# Altium PCB MemoryBoard_AT25DFxxx.PcbDoc
Units mm, origin at the board's own origin, x right, y up, seen from the top; angles counter-clockwise.
Board outline 44 x 44 mm, 2 copper layers (Top Layer, Bottom Layer), stack 1.571 mm thick; 17 components, 12 nets, 103 pads, 14 vias.
Unrouted connection lines stored in the file: 12.
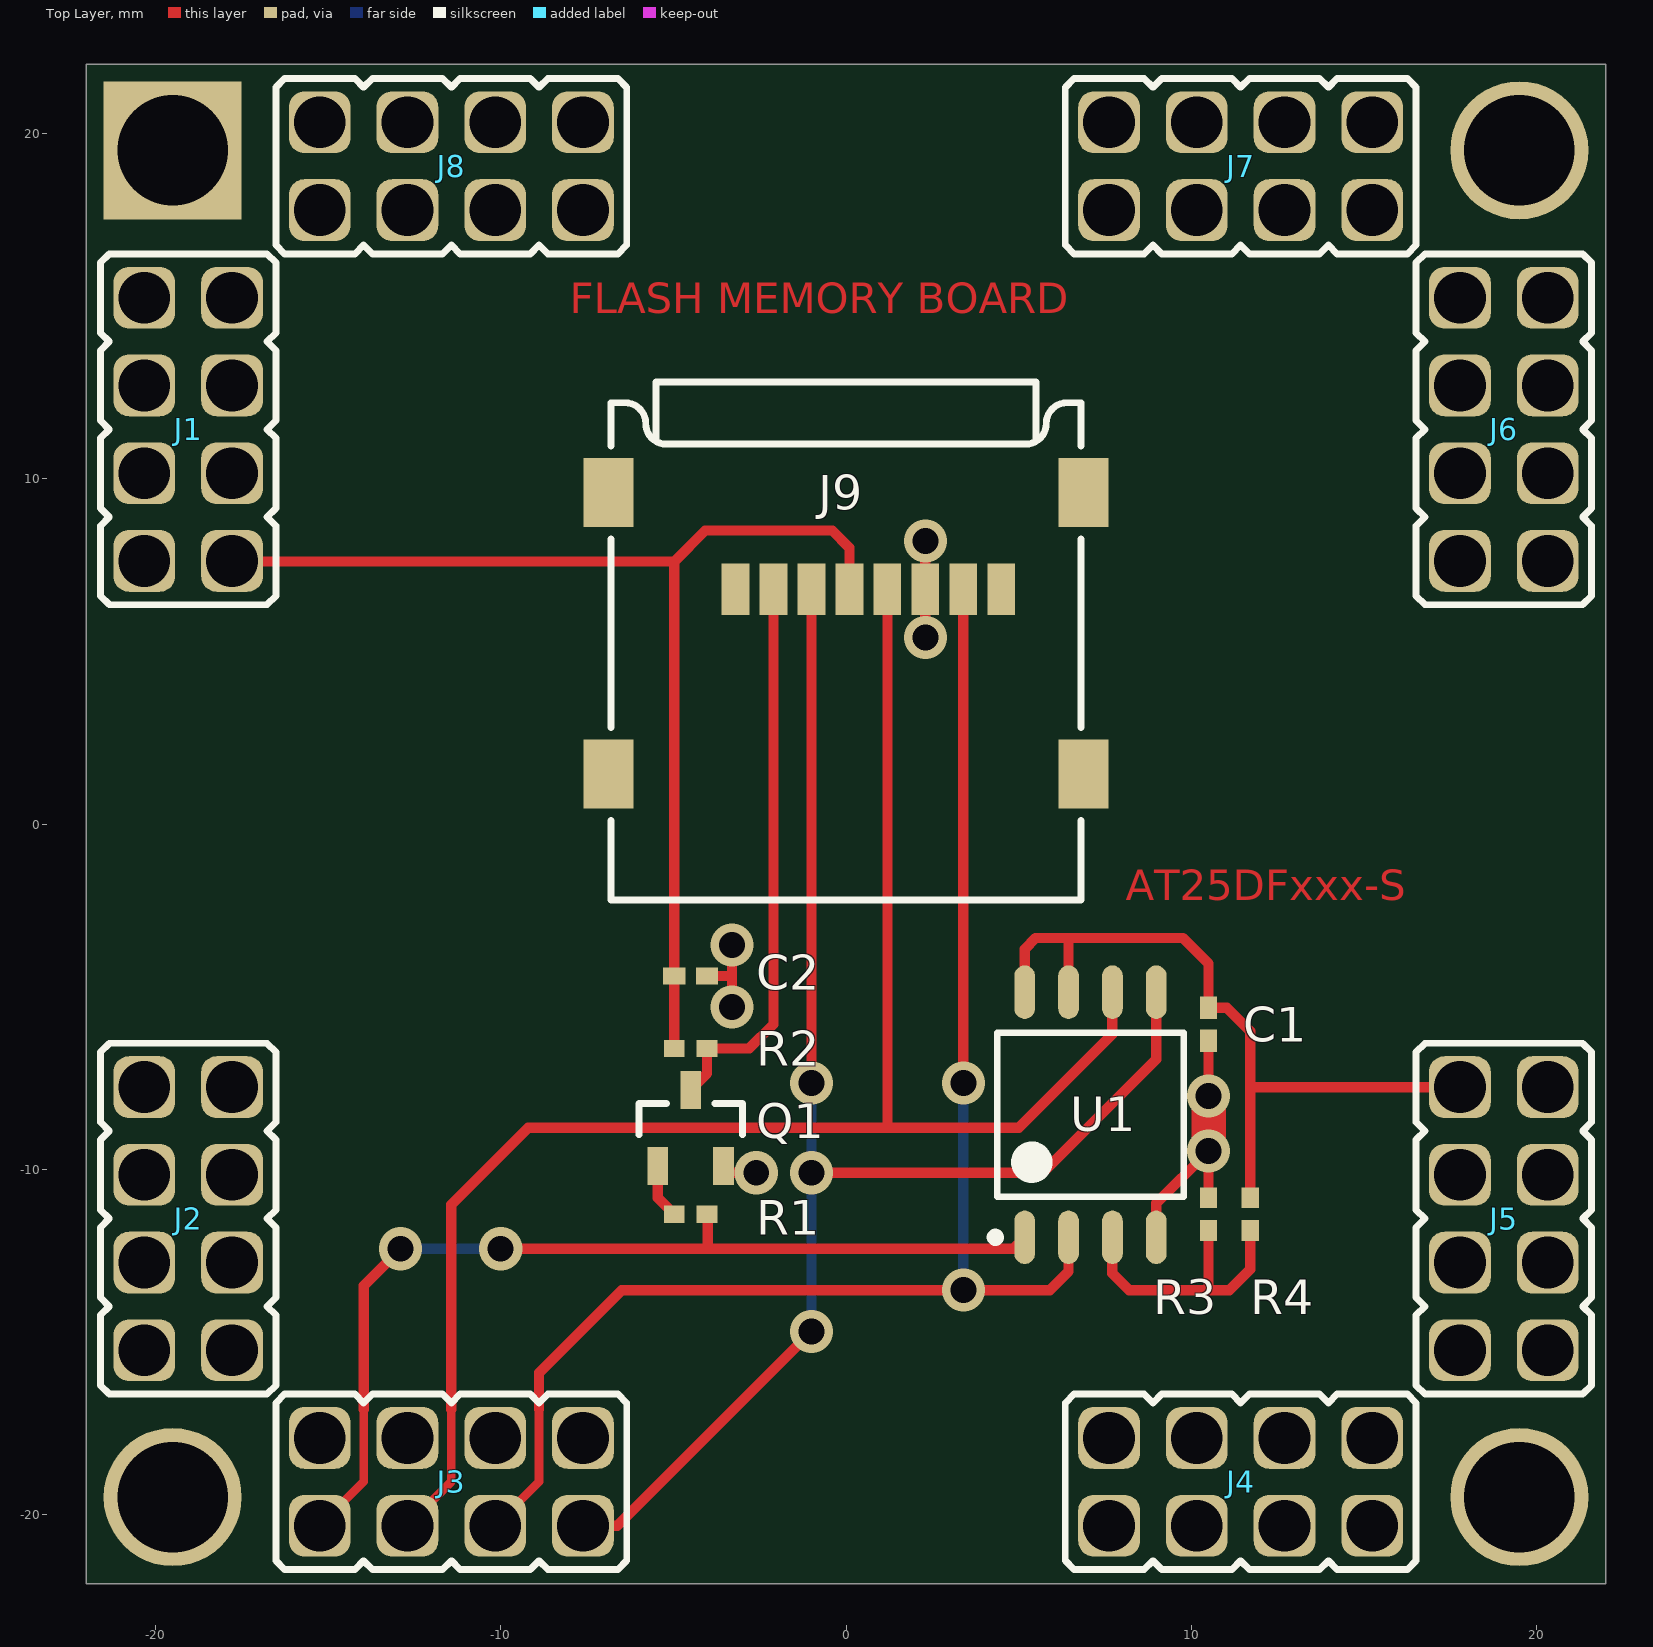
[diagram p0: Top Layer view]
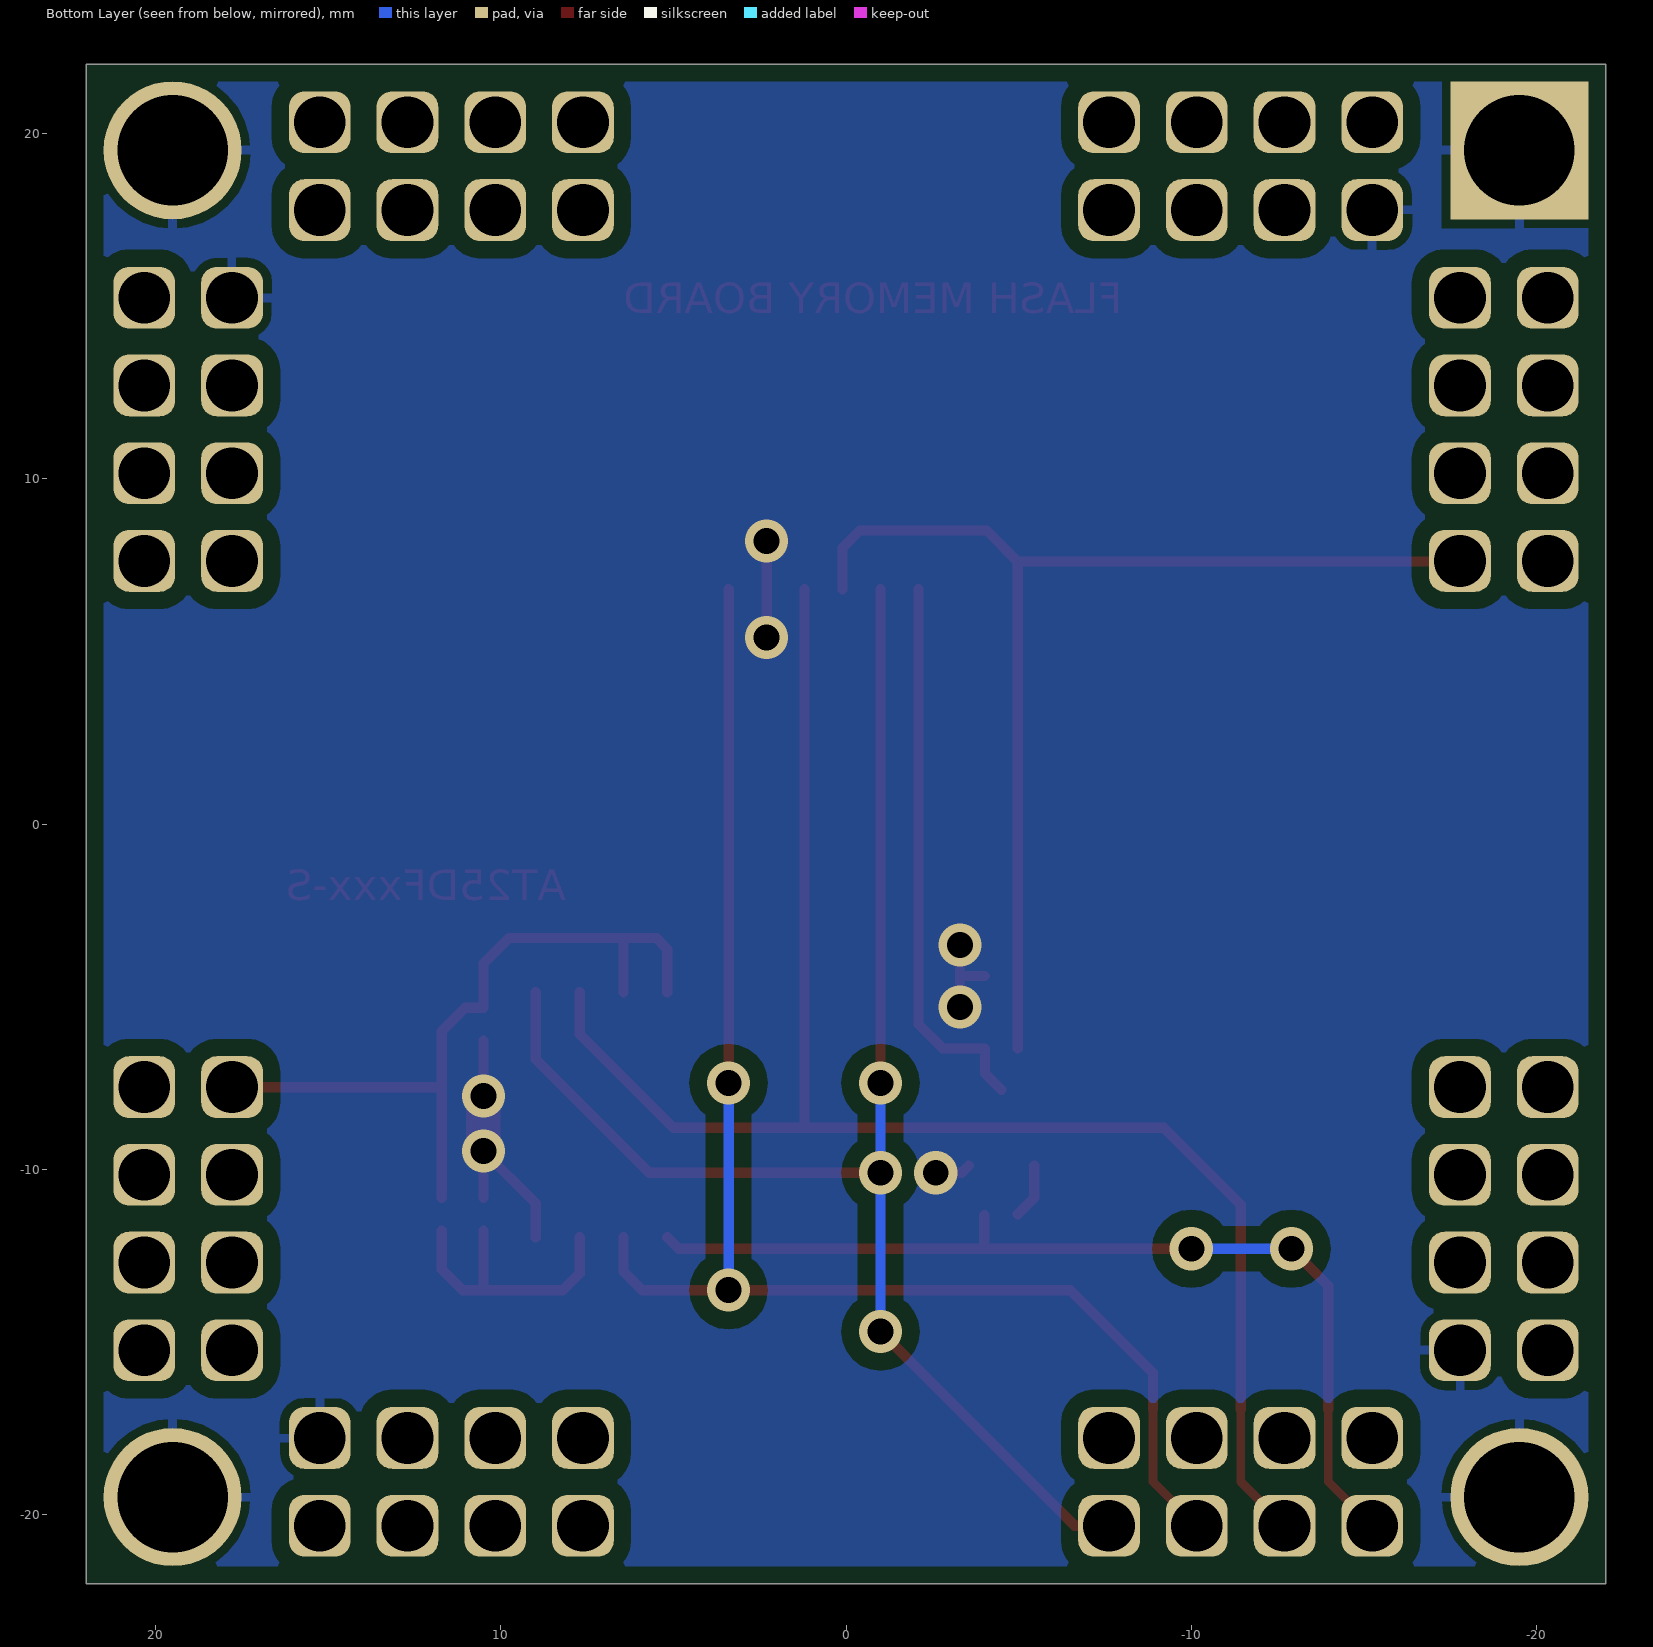
[diagram p1: Bottom Layer view, seen from below]

## Layer stack, top to bottom
Top Solder: solder mask 0.0102, Solder Resist, Dk 3.5
Top Layer: signal copper 0.0356
Dielectric 1: dielectric 1.5, FR-4, Dk 4.8
Bottom Layer: signal copper 0.0356
Bottom Solder: solder mask 0.0102, Solder Resist, Dk 3.5

## Board outline
-22,-22 22,-22 22,22 -22,22

## Design rules (kind name [scope] priority, off if disabled: settings)
Clearance Clearance_Polygon(GND) [InPolygon and InNet('GND')] p1: gap=0.5
Clearance [All] p2: gap=0.25
HoleSize [All] p1: absolutevalues=TRUE maxlimit=4 minlimit=0.3 maxpercent=80.000 minpercent=20.000
PolygonConnect PolygonConnect_Via(GND) [InNet('GND') vs IsVia] p1: connectstyle=Direct reliefconductorwidth=0.254 reliefentries=4 polygonreliefangle="90 Angle" airgapwidth=0.254
PolygonConnect [All] p2: connectstyle=Relief reliefconductorwidth=0.254 reliefentries=4 polygonreliefangle="90 Angle" airgapwidth=0.254
RoutingVias [All] p1: holewidth=0.5 width=1 viastyle="Through Hole" minholewidth=0.5 minwidth=1 maxholewidth=1.5 maxwidth=2
SolderMaskExpansion [All] p1: expansion=0.102
Width [All] p1: maxlimit=2 minlimit=0.25 preferedwidth=0.3
28 further rules are at their usual default settings.

## Classes and differential pairs
component class MemoryBoard_AT25DFxxx: C1 C2 J1 J2 J3 J4 J5 J6 J7 J8 J9 Q1 R3 R4 U1

## Components (designator, comment, footprint, x,y, rotation, side; value= is the part's Value field where it differs from the comment)
C1 "0.1/25" CAP0402 10.5,-5.8 r90 top
C2 "0.1/25" CAP0402 -4.5,-4.4 r0 top
J1 "LEFT" PBDM-8 -19.05,11.43 r270 top
J2 "LEFT" PBDM-8 -19.05,-11.43 r270 top
J3 "BOTTOM" PBDM-8 -11.43,-19.05 r0 top
J4 "BOTTOM" PBDM-8 11.43,-19.05 r0 top
J5 "RIGHT" PBDM-8 19.05,-11.43 r90 top
J6 "RIGHT" PBDM-8 19.05,11.43 r90 top
J7 "TOP" PBDM-8 11.43,19.05 r180 top
J8 "TOP" PBDM-8 -11.43,19.05 r180 top
J9 "500901-0829" "MOLEX 500901-0829" 0,-2.2 r0 top
Q1 "BC846" SOT23 -4.5,-8.8 r90 top
R1 "4.7k" RES0402 -4.5,-11.3 r180 top
R2 "10k" RES0402 -4.5,-6.5 r0 top
R3 "10k" RES0402 11.706,-11.3 r270 top
R4 "NC(10k)" RES0402 10.5,-11.3 r90 top
U1 "AT25DF041A-S" SO8-208 7.08,-8.42 r90 top

## Footprints (in the part's own frame and the unit in brackets; to place one, negate y for a bottom-side part, rotate by r counter-clockwise, add the part's x,y. Pads: shape width x height; smd on the part's side, far side on the other; paste and mask are expansions set on the pad)
CAP0402 [mm]
  rect 0.65x0.5 smd: 1(-0.475,0) 2(0.475,0)
  body extent -0.55,-0.3 0.55,0.3, height 0.5
"MOLEX 500901-0829" [mm] "TFR memory card connector. Hinge type"
  rect 0.8x1.5 smd: 1(-3.2,9) 2(-2.1,9) 3(-1,9) 4(0.1,9) 5(1.2,9) 6(2.3,9) 7(3.4,9) 8(4.5,9)
  rect 1.45x2 smd: 9(6.875,3.65) 10(-6.875,3.65) 11(-6.875,11.8) 12(6.875,11.8)
  silkscreen extent -6.8,0 6.8,15, body extent -7.3,0 7.3,14.5, height 1.93
PBDM-8 [mm] "5-pin interboard connector, pitch 2.54 mm"
  rrect50% 1.79x1.79 hole 1.5: 1(-3.81,-1.27) 2(-3.81,1.27) 3(-1.27,-1.27) 4(-1.27,1.27) 5(1.27,-1.27) 6(1.27,1.27) 7(3.81,-1.27) 8(3.81,1.27)
  silkscreen extent -5.08,-2.54 5.08,2.54, body extent -5.08,-2.54 5.08,2.54, height 3
RES0402 [mm]
  rect 0.6x0.5 smd: 1(-0.475,0) 2(0.475,0)
  body extent -0.53,-0.28 0.53,0.28, height 0.35
SO8-208 [mm] "8-lead, 0.208” Body, Plastic Small  Outline Package"
  oval 1.55x0.6 smd: 1(-3.55,1.905) 2(-3.55,0.635) 3(-3.55,-0.635) 4(-3.55,-1.905) 5(3.55,-1.905) 6(3.55,-0.635) 7(3.55,0.635) 8(3.55,1.905)
  silkscreen extent -3.67,-2.7 2.37,2.88, body extent -3.78,-2.42 3.78,2.41, height 1.7
SOT23 [mm]
  rect 1.1x0.6 smd: 1(-1.1,0.95) 2(-1.1,-0.95) 3(1.1,0)
  silkscreen extent -0.2,-1.5 0.7,1.5, body extent -1.15,-1.5 1.15,1.5, height 1.1

## Part data
C1 C2: library part CAP0402, "Ceramic chip capacitor 0402"
J1 J2 J3 J4 J5 J6 J7 J8: library part PBDM-8, "2x4-pin header, pitch 2.54 mm"
J9: "Micro SD card connector"
Q1: "NPN Silicon AF Transistor"
R1 R2 R3 R4: library part RES0402, "Ceramic chip resistor"
U1: "4-Mbit Serial Peripheral Interface Serial Flash Memory"

## Free pads (board coordinates)
  round 4 hole 3.2: 0(-19.5,-19.491) 0(19.5,-19.491) 0(19.5,19.509)
  rect 4x4 hole 3.2: 0(-19.5,19.509)

## Via types
v1: diameter 1.25, hole 0.75, Top Layer to Bottom Layer, 14 vias

## Nets (pads, with @x,y where several pads share a name; then routed paths per layer and width w, separated by ;. In a path a pad name is that pad's centre, name@x,y a point inside that pad or via, vN(x,y) a via of type N, cw(c..) or ccw(c..) an arc to the next point about the centre after c; other vN are vias at no path point)
+5V: J1.6 J3.6 J5.6 J7.6
+12V: J1.2 J3.2 J5.2 J7.2
GND: C1.1 C2.2 J2.8 J4.8 J6.8 J8.8 J9.6 pad.0 Q1.2 R4.2 U1.4 | length 14
  Top Layer w0.3: C2.2 -3.3,-4.4 ; Q1.2 -3.35,-10.1 v1(-2.6,-10.1) ; v1(-3.3,-5.3) -3.3,-4.4 ; v1(-3.3,-3.5) -3.3,-4.4 ; v1(2.3,5.4) J9.6 v1(2.3,8.2) ; U1.4 8.985,-10.985 v1(10.5,-9.47) R4.2 ; v1(10.5,-7.873) C1.1
  Top Layer w1: v1(10.5,-9.47) v1(10.5,-7.873)
MISO: J3.5 J9.7 U1.2 | length 42.8
  Top Layer w0.25: J3.5 -8.89,-19.05 -8.89,-16.956
  Top Layer w0.3: -8.89,-16.956 -8.89,-15.89 -6.5,-13.5 v1(3.4,-13.5) 5.9,-13.5 6.445,-12.955 U1.2 ; v1(3.4,-7.5) J9.7
  Bottom Layer w0.3: v1(3.4,-13.5) v1(3.4,-7.5)
MOSI: J3.7 J9.3 U1.5 | length 43.7
  Top Layer w0.3: J3.7 -6.62,-20.32 v1(-1,-14.7) ; v1(-1,-10.1) 5.7,-10.1 8.985,-6.815 U1.5 ; v1(-1,-7.5) J9.3
  Bottom Layer w0.3: v1(-1,-14.7) v1(-1,-10.1) v1(-1,-7.5)
NetJ9_2: J9.2 Q1.3 R2.2 | length 16.2
  Top Layer w0.3: Q1.3 -4.025,-7.225 R2.2 -2.8,-6.5 -2.1,-5.8 J9.2
NetQ1_1: Q1.1 R1.2 | length 1.6
  Top Layer w0.3: Q1.1 -5.45,-10.825 R1.2
NetR3_2: R3.2 R4.1 U1.3 | length 8.3
  Top Layer w0.3: U1.3 7.715,-13.015 8.2,-13.5 10.5,-13.5 ; R4.1 10.5,-13.5 ; R3.2 11.706,-12.894 11.1,-13.5 10.5,-13.5
S\S\: J3.1 R1.1 U1.1 | length 28.2
  Top Layer w0.25: J3.1 -13.97,-19.05 -13.97,-16.956
  Top Layer w0.3: -13.97,-16.956 -13.97,-13.37 v1(-12.9,-12.3) ; v1(-10,-12.3) -4,-12.3 ; R1.1@-4,-11.325 -4,-12.3 ; U1.1 4.845,-12.3 -4,-12.3
  Bottom Layer w0.3: v1(-12.9,-12.3) v1(-10,-12.3)
SCK: J3.3 J9.5 U1.6 | length 47.8
  Top Layer w0.25: J3.3 -11.43,-19.05 -11.43,-16.956
  Top Layer w0.3: -11.43,-16.956 -11.43,-11.03 -9.2,-8.8 1.2,-8.8 ; J9.5 1.2,-8.8 ; U1.6 7.715,-6.085 5,-8.8 1.2,-8.8
VBAT: J1.4 J3.4 J5.4 J7.4
VCC: C1.2 C2.1 J1.8 J3.8 J5.8 J7.8 J9.4 R2.1 R3.1 U1.7 U1.8 | length 56.2
  Top Layer w0.3: J1.8 -17.76,7.6 -4.975,7.6 ; J3.8 J3.8@-7.402,-17.78 ; R2.1 -4.975,7.6 ; J9.4 0.1,8 -0.4,8.5 -4.075,8.5 -4.975,7.6 ; U1.8 5.175,-3.625 5.5,-3.3 6.445,-3.3 ; U1.7 6.445,-3.3 ; R3.1 11.706,-7.62 ; J5.8 11.706,-7.62 ; 6.445,-3.3 9.75,-3.3 10.5,-4.05 C1.2 11.025,-5.325 11.706,-6.006 11.706,-7.62
pads on no net: J1.1 J1.3 J1.5 J1.7 J2.1 J2.2 J2.3 J2.4 J2.5 J2.6 J2.7 J4.1 J4.2 J4.3 J4.4 J4.5 J4.6 J4.7 J5.1 J5.3 J5.5 J5.7 J6.1 J6.2 J6.3 J6.4 J6.5 J6.6 J6.7 J7.1 J7.3 J7.5 J7.7 J8.1 J8.2 J8.3 J8.4 J8.5 J8.6 J8.7 J9.1 J9.8 J9.9 J9.10 J9.11 J9.12

## Polygon pours and split planes (outlines as drawn)
GND on Bottom Layer "Bottom-GND" (solid, remove dead copper, pour order 2): -21.5,-21.5 21.5,-21.5 21.5,21.5 -21.5,21.5

## Other copper
Top Layer:
  text "FLASH MEMORY BOARD" at -8,14.5 h1.52
  text "AT25DFxxx-S" at 8.1,-2.5 h1.52

## Silkscreen, mask and mechanical layers (free items; w line width, h text height)
Board:
  the board outline again, w0.2